# Altium PCB Powerboard 1.2.0.PcbDoc
Units mm, origin at the board's own origin, x right, y up, seen from the top; angles counter-clockwise.
Board outline 101.6 x 101.6 mm, 2 copper layers (Top Layer, Bottom Layer); 35 components, 20 nets, 124 pads, 0 vias.
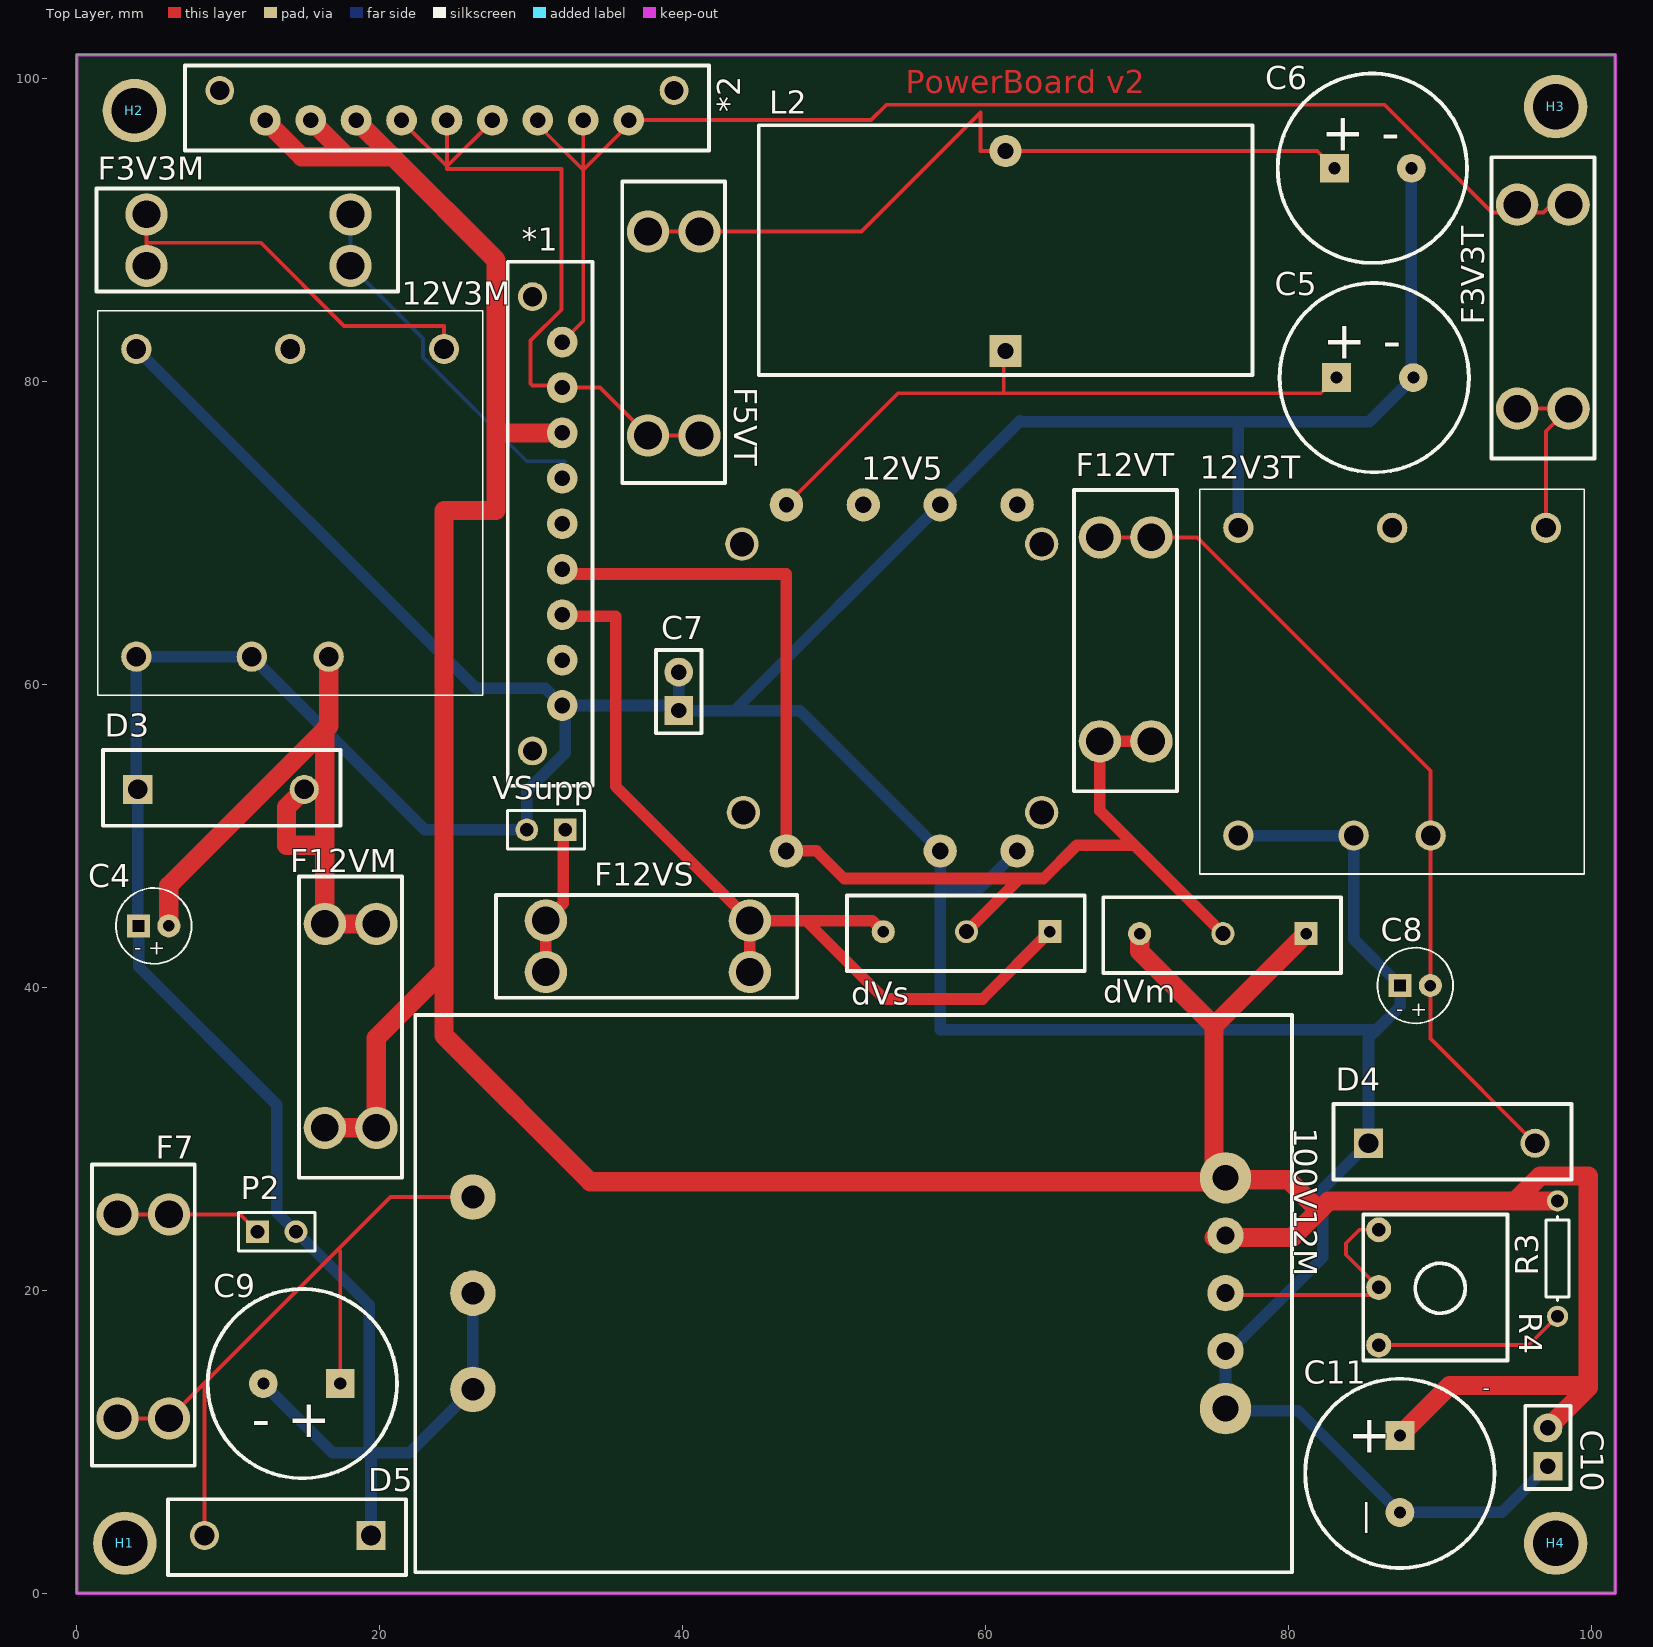
[diagram p0: Top Layer view]
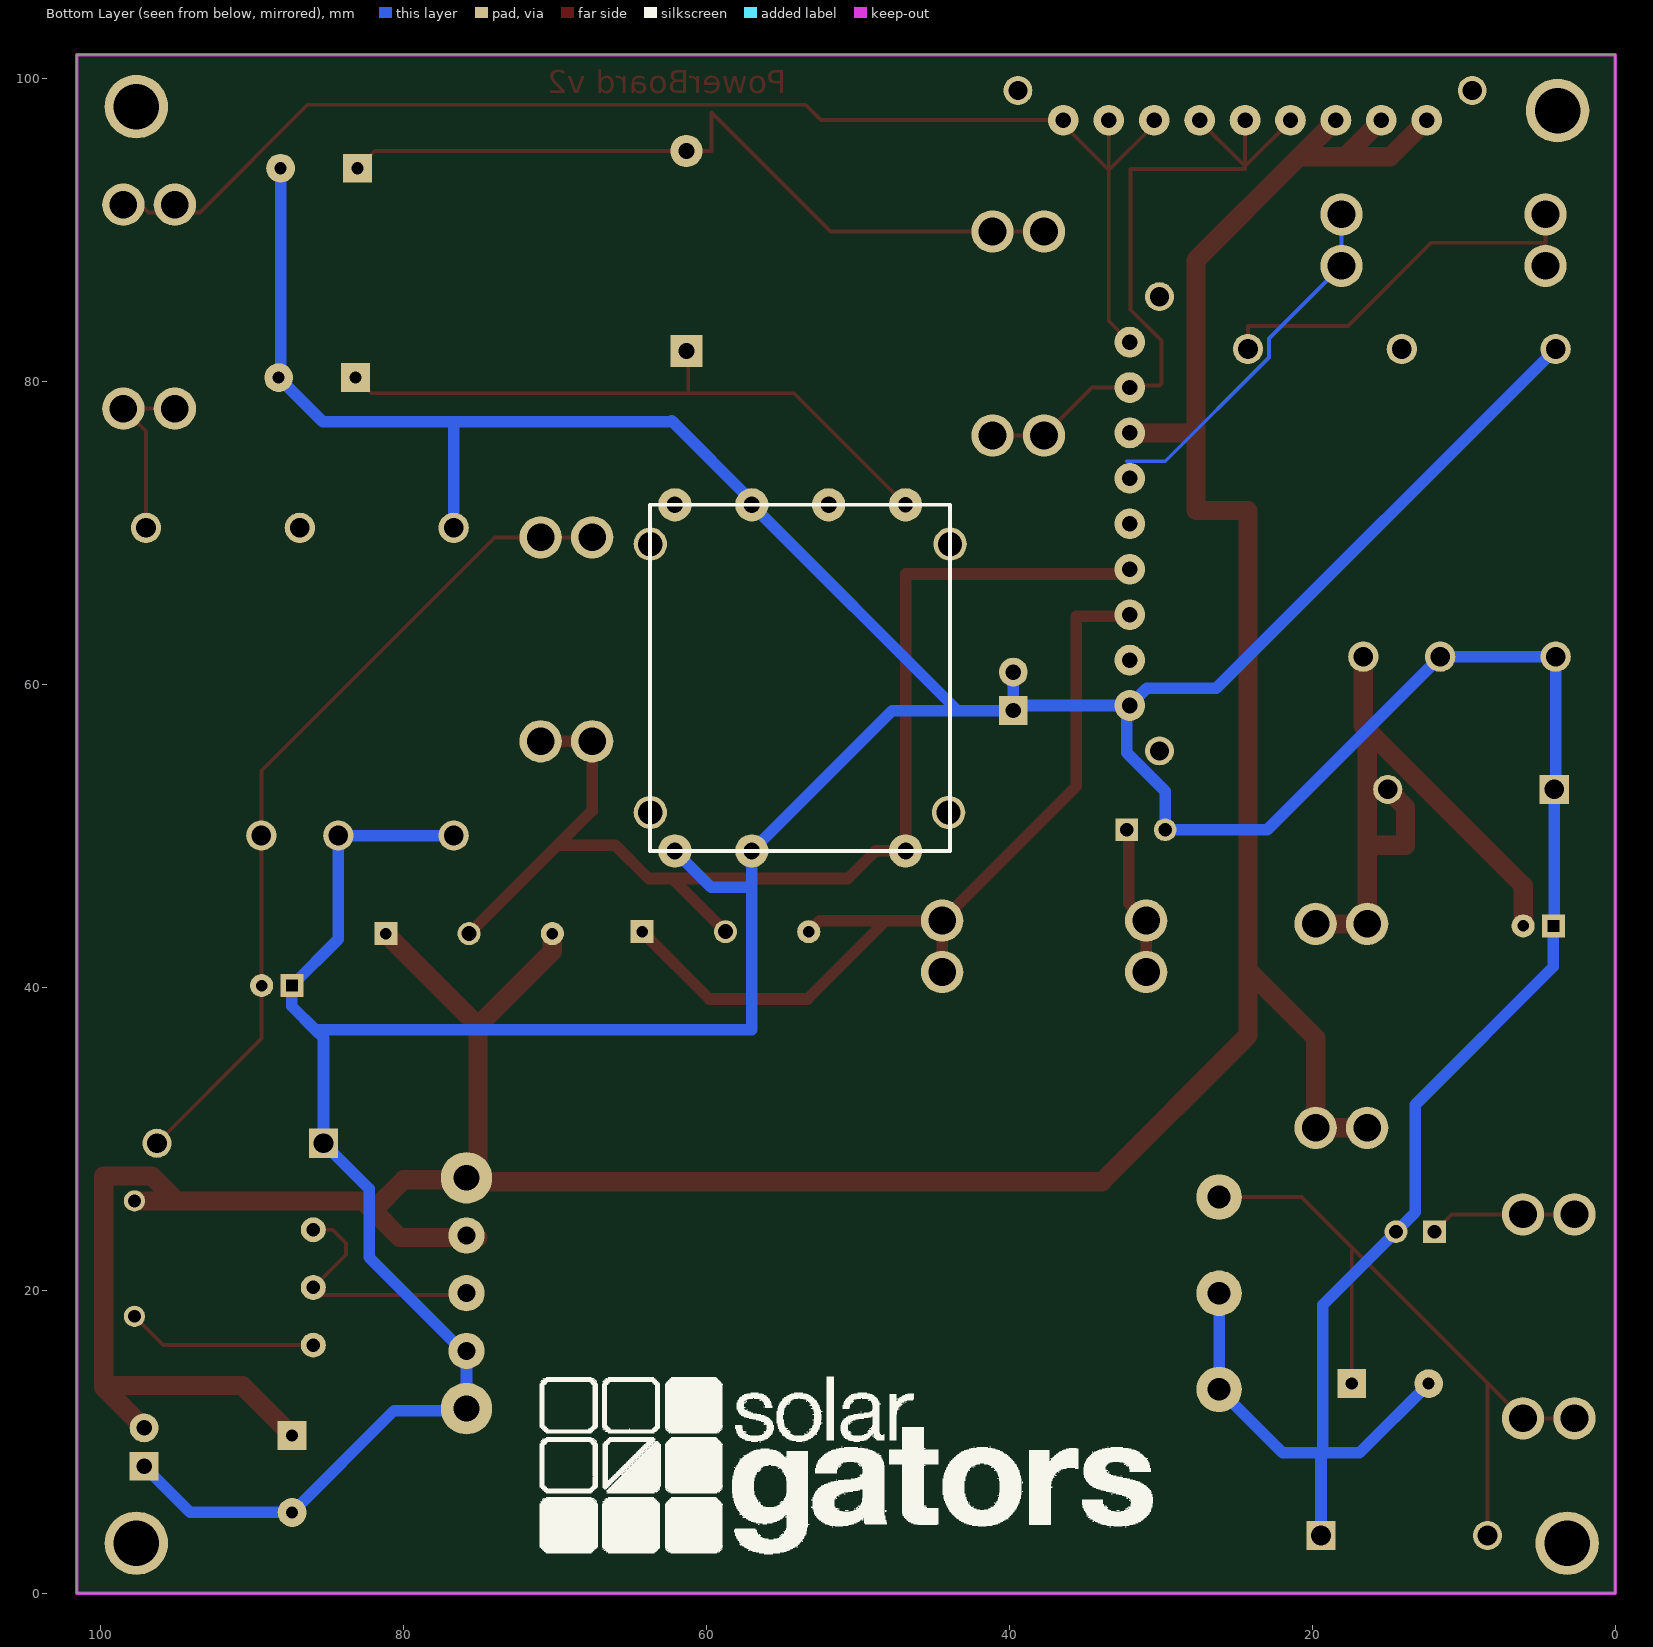
[diagram p1: Bottom Layer view, seen from below]

## Layer stack, top to bottom
Top Solder: solder mask 0.0102, Solder Resist, Dk 3.5
Top Layer: signal copper 0.0356
Dielectric 1: dielectric 0.32, FR-4, Dk 4.8
Bottom Layer: signal copper 0.0356
Bottom Solder: solder mask 0.0102, Solder Resist, Dk 3.5

## Board outline
0,0 0,101.6 101.6,101.6 101.6,0

## Design rules (kind name [scope] priority, off if disabled: settings)
Clearance [All] p1: gap=0.254 ignorepadtopadclearanceinfootprint=FALSE except(0: Arc-Hole Track-Hole SMDPad-Hole THPad-Hole Via-Hole Fill-Hole Poly-Hole Region-Hole Text-Hole; 1: Arc-Fill Arc-Poly Arc-Region Track-Fill Track-Poly Track-Region SMDPad-Fill SMDPad-Poly SMDPad-Region THPad-Fill THPad-Poly THPad-Region Via-Fill Via-Poly Via-Region)
PlaneConnect PlaneConnect_1 [All] p1: planeconnectstyle=Relief reliefexpansion=0.508 reliefentries=4 reliefconductorwidth=0.254 reliefairgap=0.254
PlaneConnect [All] p2: planeconnectstyle=Relief reliefexpansion=0.508 reliefentries=4 reliefconductorwidth=0.254 reliefairgap=0.254
PolygonConnect [All] p1: connectstyle=Relief reliefconductorwidth=0.254 reliefentries=4 polygonreliefangle="90 Angle" airgapwidth=0.254
RoutingVias [All] p1: holewidth=0.711 width=1.27 viastyle="Through Hole" minholewidth=0.711 minwidth=1.27 maxholewidth=0.711 maxwidth=1.27
SolderMaskExpansion [All] p1: expansion=0.102
Width "Schematic Width Constraint_4" [InNet('12VT')] p1: maxlimit=0.762 minlimit=0.762 preferedwidth=0.762 minimp=50.000000 maximp=50.000000 favimp=50.000000
Width "Schematic Width Constraint_11" [InNet('Net12V3M_1')] p2: maxlimit=1.27 minlimit=1.27 preferedwidth=1.27 minimp=50.000000 maximp=50.000000 favimp=50.000000
Width "Schematic Width Constraint_10" [InNet('GND')] p3: maxlimit=0.762 minlimit=0.762 preferedwidth=0.762 minimp=50.000000 maximp=50.000000 favimp=50.000000
Width "Schematic Width Constraint_3" [InNet('Pre12VS')] p4: maxlimit=0.762 minlimit=0.762 preferedwidth=0.762 minimp=50.000000 maximp=50.000000 favimp=50.000000
Width "Schematic Width Constraint_2" [InNet('12VS')] p5: maxlimit=0.762 minlimit=0.762 preferedwidth=0.762 minimp=50.000000 maximp=50.000000 favimp=50.000000
Width "Pre12VM WIdth" [InNet('Pre12VM')] p6: maxlimit=1.27 minlimit=1.27 preferedwidth=1.27 minimp=50.000000 maximp=50.000000 favimp=50.000000
Width "Schematic Width Constraint_1" [InNet('12VM')] p7: maxlimit=1.27 minlimit=1.27 preferedwidth=1.27 minimp=50.000000 maximp=50.000000 favimp=50.000000
Width "12VM Width" [InNet('12VM')] p8: maxlimit=1.27 minlimit=1.27 preferedwidth=1.27 minimp=50.000000 maximp=50.000000 favimp=50.000000
Width "12VT Width" [InNet('12VT')] p9: maxlimit=0.762 minlimit=0.762 preferedwidth=0.762 minimp=50.000000 maximp=50.000000 favimp=50.000000
Width "3v3m width" [InNet('3V3M')] p10: maxlimit=0.254 minlimit=0.254 preferedwidth=0.254
Width "3v3t width" [InNet('3V3T')] p11: maxlimit=0.254 minlimit=0.254 preferedwidth=0.254
Width "5vt width" [InNet('5VT')] p12: maxlimit=0.254 minlimit=0.254 preferedwidth=0.254
Width Width* [All] p13: maxlimit=0.254 minlimit=0.254 preferedwidth=0.254
29 further rules are at their usual default settings.

## Components (designator, comment, footprint, x,y, rotation, side; value= is the part's Value field where it differs from the comment)
12V3M "CCG152403S" CCG152403S 16.637,61.849 r90 top
12V3T "CCG152403S" CCG152403S 89.408,50.038 r90 top
12V5 "12-5V Converter" CC6-1205SF-E 57.023,71.882 r270 top
100V12M "75DCDC" 100DC12 26.162,19.812 r0 top
*1 "9-Pin Connector" 9-PIN 28.459,87.926 r270 top
*2 "9-Pin Connector" 9-PIN 41.746,100.882 r180 top
C4 "Cap" "200mm Cap" 5.08,44.069 r0 top value="min 120uF"
C5 "Cap Pol1" 200MILCAP 83.185,80.278 r0 top value=50uF
C6 "Cap Pol1" 200MILCAP 83.058,94.107 r0 top value=50uF
C7 "Cap" 100MILCAP 39.751,58.293 r90 top value=1nF
C8 "Cap" "200mm Cap" 88.392,40.132 r0 top value="min 120uF"
C9 "200V" 200MILCAP 17.399,13.843 r180 top value=47uF
C10 "Cap" 100MILCAP 97.155,8.382 r90 top value=2.2uF
C11 "Cap2" 200MILCAP 87.376,10.414 r270 top value=470uF
D3 "Diode 1N4934" 2PINDIODE 9.525,53.086 r0 top
D4 "Diode 1N4934" 2PINDIODE 90.805,29.718 r0 top
D5 "Diode 1N4001" 2PINDIODE 13.931,3.81 r180 top
dVm "Diode 1N4934" 3PINDIODE 75.692,43.561 r180 top
dVs "Diode 1N4934" 3PINDIODE 58.762,43.688 r180 top
F3V3M "Fuse" "FUSE HILDER" 1.305,85.959 r0 top
F3V3T "Fuse" "FUSE HILDER" 100.223,74.932 r90 top
F5VT "Fuse" "FUSE HILDER" 36.019,93.224 r270 top
F7 "Fuse" "FUSE HILDER" 0.996,28.319 r270 top
F12VM "Fuse" "FUSE HILDER" 21.483,27.434 r90 top
F12VS "Fuse" "FUSE HILDER" 27.68,39.321 r0 top
F12VT "Fuse" "FUSE HILDER" 72.664,52.961 r90 top
H1 "Hole 3mm" "Hole 3mm" 3.175,3.302 r0 top
H2 "Hole 3mm" "Hole 3mm" 3.81,97.917 r0 top
H3 "Hole 3mm" "Hole 3mm" 97.663,98.171 r0 top
H4 "Hole 3mm" "Hole 3mm" 97.663,3.302 r0 top
L2 "Inductor" INDUCTOR 61.341,82.042 r90 top value=100uH
P2 "VMain" HDR1X2 11.938,23.876 r0 top
R3 "Res1" AXIAL-0.3 97.79,22.098 r270 top value=1K
R4 "RPot" "POT inline wide" 85.979,22.733 r270 top value=1K
VSupp "" HDR1X2 32.258,50.419 r180 top

## Footprints (in the part's own frame and the unit in brackets; to place one, negate y for a bottom-side part, rotate by r counter-clockwise, add the part's x,y. Pads: shape width x height; smd on the part's side, far side on the other; paste and mask are expansions set on the pad)
2PINDIODE [mm]
  rect 1.924x1.924 hole 1.3: 1(-5.5,0)
  round 1.924 hole 1.3: 3(5.5,0)
  silkscreen extent -7.8,-2.4 7.9,2.6
3PINDIODE [mil]
  rect 60x60 hole 30: 1(-216.54,0)
  round 60 hole 38.98: 2(0,0)
  round 60 hole 30: 3(216.54,0)
  silkscreen extent -307,-94 311,102
9-PIN [mil]
  round 80 hole 41: 1(1153.54,141.73)
  round 80 hole 40: 2(1035.43,141.73) 3(917.32,141.73) 4(799.21,141.73) 5(681.1,141.73) 6(562.99,141.73) 7(444.88,141.73) 8(326.77,141.73) 9(208.66,141.73)
  round 75 hole 50: 10(90.55,64.57) 11(1271.65,64.57)
  silkscreen extent 0,0 1362,220
100DC12 [mm]
  round 3 hole 1.5: 1(0,-6.35) 2(0,0) 3(0,6.35)
  round 3.4 hole 1.7: 4(49.7,7.62) 8(49.7,-7.62)
  round 2.4 hole 1.2: 5(49.7,3.81) 6(49.7,0.01) 7(49.7,-3.81)
  silkscreen extent -3.81,-18.43 54.1,18.37
100MILCAP [mil]
  rect 75x75 hole 40: 1(0,0)
  round 75 hole 40: 2(100,0)
  silkscreen extent -59,-59 157,59
200MILCAP [mm]
  rect 1.905x1.905 hole 0.8: 1(0,0)
  round 1.905 hole 0.8: 2(5.08,0)
  silkscreen extent -3.75,-6.25 8.75,6.25
"200mm Cap" [mil]
  rect 60x60 hole 30 square: 1(-39.37,0)
  round 60 hole 30: 2(39.37,0)
  silkscreen extent -98,-98 98,98
AXIAL-0.3 [mm] "Axial Device, Thru-Hole; 2 Leads; 0.3 in Pin Spacing"
  round 1.4 hole 0.85: 1(-3.81,0) 2(3.81,0)
  silkscreen extent -2.77,-0.76 2.77,0.76
CC6-1205SF-E [mm] "12DC5"
  round 2.2 hole 1.1: 1(22.86,-10.16) 2(22.86,0) 3(22.86,5.08) 4(0,5.08) 5(0,0) 6(0,-5.08)
  round 2.2 hole 1: 7(0,-10.16)
  round 2.2 hole 1.6: a(2.6,6.7) a(2.6,-13.1) a(20.32,6.7) a(20.32,-13)
CCG152403S [mm]
  round 2 hole 1.3: 1(0,0) 2(0,5.08) 3(0,12.7) 4(20.32,12.7) 5(20.32,2.54) 6(20.32,-7.62)
  silkscreen extent -2.54,-10.16 22.86,15.24, body extent -2.54,-10.16 22.86,15.24, height 9.9
"FUSE HILDER" [mil]
  round 110 hole 72: 1(129.92,66.93) 1(129.92,200.79) 2(660.24,66.93) 2(660.24,200.79)
  silkscreen extent 0,0 783,268
HDR1X2 [mm] "Connector; Header; 2 Position"
  rect 1.5x1.5 hole 0.9: 1(0,0)
  round 1.5 hole 0.9: 2(2.54,0)
  silkscreen extent -1.27,-1.27 3.81,1.27
"Hole 3mm" [mil]
  round 165 hole 118.11: 1(0,0)
INDUCTOR [mm] "100uH"
  rect 2.13x2.13 hole 1.067 mask+0.2: 1(0,0)
  round 2.13 hole 1.067 mask+0.7: 2(13.2,0)
  silkscreen extent -1.6,-16.3 14.9,16.3
"POT inline wide" [mil]
  round 65 hole 35: 1(-50,0) 2(100,0) 3(250,0)
  silkscreen extent -90,-40 290,335

## Part data
12V3M 12V3T: "Power Supply", Manufacturer_Name="TDK LAMBDA", Datasheet Link=https://componentsearchengine.com/Datasheets/2/CCG152403S.pdf, Height=9.9mm, Manufacturer_Part_Number=CCG152403S
C4 C7 C8 C10 C11: "Capacitor", Publisher="Altium Limited"
  C4 C7 C8 C10: LatestRevisionDate=17-Jul-2002, LatestRevisionNote="Re-released for DXP Platform.", PackageDescription="Radial Cap, Thru-Hole; 2 Leads; 0.3 in Pin Spacing", PackageReference=RAD-0.3, Published=8-Jun-2000
  C11: PackageDescription="Capacitor; 2 Leads", PackageReference=CAPR5-4X5, Published=23-Sep-2002
C5 C6: "Polarized Capacitor (Radial)", LatestRevisionDate=17-Jul-2002, LatestRevisionNote="Re-released for DXP Platform.", PackageDescription="Polarized Capacitor (Radial); 2 Leads", PackageReference=RB7.6-15, Published=8-Jun-2000, Publisher="Altium Limited"
C9: library part Cap2, "Capacitor", PackageDescription="Capacitor; 2 Leads", PackageReference=CAPR5-4X5, Published=23-Sep-2002, Publisher="Altium Limited"
D3 D4 dVm dVs: "1 Amp Fast Recovery Rectifier", Code_JEDEC=DO-204-AL, ComponentLink1Description="Manufacturer Link", ComponentLink1URL=http://www.fairchildsemi.com/, ComponentLink2Description=Datasheet, ComponentLink2URL=http://www.fairchildsemi.com/ds/1N%2F1N4934.pdf, DatasheetVersion=1999, LatestRevisionDate=17-Jul-2002, LatestRevisionNote="Re-released for DXP Platform.", PackageDescription="Diode, Axial; Body 5.2 x 2.7 mm (LxDia. max), Lead Dia. 0.86 mm (max)", PackageReference=DO-41, PackageVersion=Aug-1999, Published=8-Jun-2000, Publisher="Altium Limited"
D5: "1 Amp General Purpose Rectifier", Code_JEDEC=DO-204-AL, ComponentLink1Description="Manufacturer Link", ComponentLink1URL=http://www.fairchildsemi.com/, ComponentLink2Description=Datasheet, ComponentLink2URL=http://www.fairchildsemi.com/ds/1N%2F1N4001.pdf, DatasheetVersion=1998, LatestRevisionDate=17-Jul-2002, LatestRevisionNote="Re-released for DXP Platform.", PackageDescription="Diode, Axial; Body 5.2 x 2.7 mm (LxDia. max), Lead Dia. 0.86 mm (max)", PackageReference=DO-41, PackageVersion=Aug-1999, Published=8-Jun-2000, Publisher="Altium Limited"
F7: library part "Fuse 2", LatestRevisionDate=17-Jul-2002, LatestRevisionNote="Re-released for DXP Platform.", PackageDescription="Thru-Hole; 2 Leads", PackageReference=PIN-W2/E2.8, Published=8-Jun-2000, Publisher="Altium Limited"
P2 VSupp: library part "Header 2", "Header, 2-Pin", LatestRevisionDate=17-Jul-2002, LatestRevisionNote="Re-released for DXP Platform.", Publisher="Altium Limited"
R3: "Resistor", LatestRevisionDate=17-Jul-2002, LatestRevisionNote="Re-released for DXP Platform.", PackageDescription="Axial Device, Thru-Hole; 2 Leads; 0.3 in Pin Spacing", PackageReference=AXIAL-0.3, Published=8-Jun-2000, Publisher="Altium Limited"
R4: library part RPot_3, "Potentiometer", LatestRevisionDate=17-Jul-2002, LatestRevisionNote="Re-released for DXP Platform.", PackageDescription="Variable Resistor, Thru-Hole; 3 Leads", PackageReference=VR5, Published=8-Jun-2000, Publisher="Altium Limited", Set Position=0.5, Sim Note="Enter the Resistance value and the set point into parameter fields."
L2: Code_IEC=1005, Code_JEITA=0402, LatestRevisionDate=29-May-2009, LatestRevisionNote="IPC-7351 Footprint Added.", PackageDescription="Chip Inductor", PackageReference=0402-A, Published=8-Jun-2000, Publisher="Altium Limited"

## Nets (pads, with @x,y where several pads share a name; then routed paths per layer and width w, separated by ;. In a path a pad name is that pad's centre, name@x,y a point inside that pad or via, vN(x,y) a via of type N, cw(c..) or ccw(c..) an arc to the next point about the centre after c; other vN are vias at no path point)
3V3M: *1.6 F3V3M.2 | length 23.7
  Bottom Layer w0.254: F3V3M.2@18.075,91.059 18.075,87.659 22.876,82.858 22.876,81.597 29.718,74.755 32.258,74.755
3V3T: *1.9 *2.7 *2.8 *2.9 F3V3T.2 | length 90
  Top Layer w0.254: *2.7 30.446,96.98 33.446,93.98 ; *1.9 33.446,84.013 33.446,93.98 ; *2.8 33.446,93.98 ; F3V3T.2@98.523,91.702 97.388,91.702 96.872,91.186 93.472,91.186 86.36,98.298 53.467,98.298 52.451,97.282 *2.9 36.446,96.98 33.446,93.98
5VT: *1.8 *2.4 *2.5 *2.6 F5VT.2 | length 46.9
  Top Layer w0.254: *2.4 21.446,97.234 24.446,94.234 ; *2.5 24.446,94.234 ; *2.6 27.446,97.234 24.446,94.234 ; F5VT.2@41.119,76.454 37.719,76.454 34.547,79.626 *1.8 31.929,79.756 30.099,79.756 29.972,79.883 29.972,82.732 32.004,84.764 32.004,94.045 24.446,94.045 24.446,94.234
12VM: 100V12M.4 100V12M.5 *1.7 *2.1 *2.2 *2.3 C10.2 C11.1 dVm.1 dVm.3 F12VM.1 R3.1 | length 251.7
  Top Layer w1.27: *2.1 14.859,94.869 17.859,94.869 ; *2.2 17.859,94.869 ; F12VM.1@16.383,30.734 19.783,30.734 19.783,36.674 24.257,41.148 ; *2.3 20.859,94.869 ; *1.7 27.768,76.626 27.686,76.708 ; dVm.3 70.192,42.377 75.1,37.469 ; 100V12M.5@75.1,23.495 80.264,23.495 82.042,25.273 ; 100V12M.4@75.862,27.178 33.909,27.178 24.257,36.83 24.257,41.148 ; dVm.1 75.1,37.469 ; C11.1 90.678,13.716 99.822,13.716 ; C10.2 99.822,13.589 99.822,13.716 ; R3.1 94.996,25.908 ; 17.859,94.869 20.859,94.869 ; 20.859,94.869 27.686,88.042 27.686,76.708 ; 24.257,41.148 24.257,71.501 27.686,71.501 27.686,76.708 ; 75.1,37.469 75.1,27.305 80.01,27.305 82.042,25.273 ; 82.042,25.273 82.677,25.908 94.996,25.908 ; 94.996,25.908 96.647,27.559 99.822,27.559 99.822,13.716
12VS: *1.3 dVs.1 dVs.3 F12VS.2 | length 59.9
  Top Layer w0.762: *1.3 32.169,64.516 35.591,64.516 35.591,53.28 F12VS.2@44.45,44.421 ; F12VS.2@44.45,41.021 F12VS.2@44.45,44.421 ; dVs.3 52.529,44.421 48.162,44.421 ; dVs.1 59.817,39.243 53.34,39.243 48.162,44.421 ; F12VS.2@44.45,44.421 48.162,44.421
12VT: 12V5.1 *1.4 dVm.2 dVs.2 F12VT.1 | length 82.5
  Top Layer w0.762: *1.4 32.375,67.31 46.863,67.31 12V5.1 48.851,49.022 50.673,47.2 62.274,47.2 ; dVs.2 62.274,47.2 ; 69.215,49.53 69.088,49.403 ; F12VT.1@70.964,56.261 67.564,56.261 67.564,51.689 69.85,49.403 ; dVm.2 69.85,49.403 ; 62.274,47.2 63.837,47.2 66.04,49.403 69.088,49.403 ; 69.088,49.403 69.85,49.403
CANH: *1.2
CANL: *1.5
GND: 12V3M.2 12V3M.3 12V3M.4 12V3T.2 12V3T.3 12V3T.4 12V5.2 12V5.3 12V5.5 100V12M.1 100V12M.2 100V12M.7 100V12M.8 *1.1 C4.1 C5.2 C6.2 C7.1 C7.2 C8.1 C9.2 C10.1 C11.2 D3.1 D4.1 D5.1 P2.2 VSupp.2 | length 397.2
  Bottom Layer w0.762: 12V3M.4 26.351,59.755 30.93,59.755 *1.1 ; C9.2 16.891,9.271 19.304,9.271 ; D5.1 19.431,9.144 19.304,9.271 ; 100V12M.2 100V12M.1 21.971,9.271 19.304,9.271 ; C7.2 C7.1 ; 12V5.3 59.69,46.609 57.023,46.609 ; 100V12M.8@75.1,12.065 80.645,12.065 C11.2 94.107,5.334 C10.1 ; 100V12M.8 100V12M.7@75.862,15.875 ; 100V12M.7 100V12M.7@75.862,15.875 ; 12V3T.3 12V3T.2 84.328,43.196 C8.1 87.392,38.751 85.852,37.211 ; 12V3T.4 76.708,77.113 76.454,77.367 ; C6.2 88.138,80.405 C5.2 85.354,77.367 76.454,77.367 ; 19.304,9.271 19.304,19.05 P2.2 13.208,25.146 13.208,32.258 4.08,41.386 C4.1 4.025,44.124 D3.1 3.937,53.174 12V3M.3 12V3M.2 22.987,50.419 VSupp.2 29.718,52.959 32.258,55.499 32.258,58.427 *1.1 ; *1.1 39.418,58.626 C7.1 ; C7.1 43.434,58.293 ; 43.434,58.293 47.752,58.293 12V5.2 57.023,46.609 ; 43.434,58.293 12V5.5 57.023,72.136 62.314,77.427 62.374,77.367 76.454,77.367 ; 57.023,46.609 57.023,37.211 85.852,37.211 ; 100V12M.7@75.862,15.875 75.989,15.875 82.296,22.182 82.296,26.709 D4.1 85.305,36.664 85.852,37.211
Net12V3M_1: 12V3M.1 C4.2 D3.3 F12VM.2 | length 45.1
  Top Layer w1.27: C4.2 6.08,46.72 16.383,57.023 ; D3.3 13.843,51.904 13.843,49.403 16.383,49.403 ; 12V3M.1 16.637,57.277 16.383,57.023 ; F12VM.2@19.783,44.204 16.383,44.204 16.383,49.403 ; 16.383,49.403 16.383,57.023
Net12V3T_1: 12V3T.1 C8.2 D4.3 F12VT.2 | length 55.7
  Top Layer w0.254: F12VT.2@67.564,69.731 70.964,69.731 73.994,69.731 89.408,54.317 12V3T.1 89.408,40.148 C8.2 89.392,36.631 D4.3
Net12V5_3: 12V5.7 C5.1 L2.1 | length 42.6
  Top Layer w0.254: 12V5.7 54.229,79.248 61.214,79.248 ; L2.1 61.214,81.915 61.214,79.248 ; C5.1 82.155,79.248 61.214,79.248
NetR3_2: R3.2 R4.3 | length 12.6
  Top Layer w0.254: R4.3 95.885,16.383 R3.2
Pre3V3M: 12V3M.6 F3V3M.1 | length 26.9
  Top Layer w0.254: F3V3M.1@4.605,87.659 4.605,89.183 ; F3V3M.1@4.605,91.059 4.605,89.183 ; 12V3M.6 24.257,83.693 17.653,83.693 12.163,89.183 4.605,89.183
Pre3V3T: 12V3T.6 F3V3T.1 | length 11.9
  Top Layer w0.254: F3V3T.1@95.123,78.232 98.523,78.232 97.028,76.737 12V3T.6
Pre5VT: C6.1 F5VT.1 L2.2 | length 51.6
  Top Layer w0.254: F5VT.1@37.719,89.924 41.119,89.924 51.824,89.924 59.69,97.79 59.69,95.242 L2.2 81.923,95.242 C6.1
Pre12VS: F12VS.1 VSupp.1 | length 9.6
  Top Layer w0.762: F12VS.1@30.98,41.021 30.98,44.421 32.131,45.572 VSupp.1@32.131,50.165
PreVMain: F7.1 P2.1 | length 9.7
  Top Layer w0.254: F7.1@2.696,25.019 6.096,25.019 10.795,25.019 P2.1
Trim: 100V12M.6 R4.1 R4.2 | length 17.4
  Top Layer w0.254: 100V12M.6@75.1,19.695 85.481,19.695 R4.2 83.82,22.352 83.82,23.114 84.709,24.003 R4.1
VMain: 100V12M.3 C9.1 D5.3 F7.2 | length 48.5
  Top Layer w0.254: F7.2@2.696,11.549 6.096,11.549 8.431,13.884 ; D5.3 8.431,13.884 ; C9.1 17.399,22.614 17.28,22.733 ; 100V12M.3 20.709,26.162 17.28,22.733 ; 8.431,13.884 17.28,22.733
pads on no net: 12V3M.5 12V3T.5 12V5.4 12V5.6 12V5.a *1.10 *1.11 *2.10 *2.11 H1.1 H2.1 H3.1 H4.1

## Polygon pours and split planes (outlines as drawn)
no net on Top Layer "Top Layer-No Net" (solid, shelved, pour order 0): 0,0 0,101.6 101.6,101.6 101.6,0
no net on Bottom Layer "Bottom Layer-No Net" (solid, shelved, pour order 2): 0,0 0,101.6 101.6,101.6 101.6,0

## Keep-outs
Keep-Out Layer:
  the board outline again, w0.254

## Other copper
Top Layer:
  text "PowerBoard v2" at 54.737,99.06 h1.52

## Silkscreen, mask and mechanical layers (free items; w line width, h text height)
Top Overlay:
  text "+ -" at 82.169,95.25 h2.5
  text "+ -" at 82.296,81.534 h2.5
  text "- +" at 3.81,42.164 h1
  text "- +" at 87.122,38.1 h1
  text "-" at 92.837,13.081 h1
  text "- +" at 11.557,10.287 h2.5
  text "+" at 83.947,9.271 h2.5
  text "|" at 84.836,4.445 h1.5
Bottom Overlay:
  drawing of 2657 lines, arcs and shapes, not listed